# Altium PCB PCB1.PcbDoc
Units mil, origin at the board's own origin, x right, y up, seen from the top; angles counter-clockwise.
Board outline 4570.03 x 2655.03 mil, 2 copper layers (Top Layer, Bottom Layer); 58 components, 54 nets, 178 pads, 16 vias.
Unrouted connection lines stored in the file: 14.
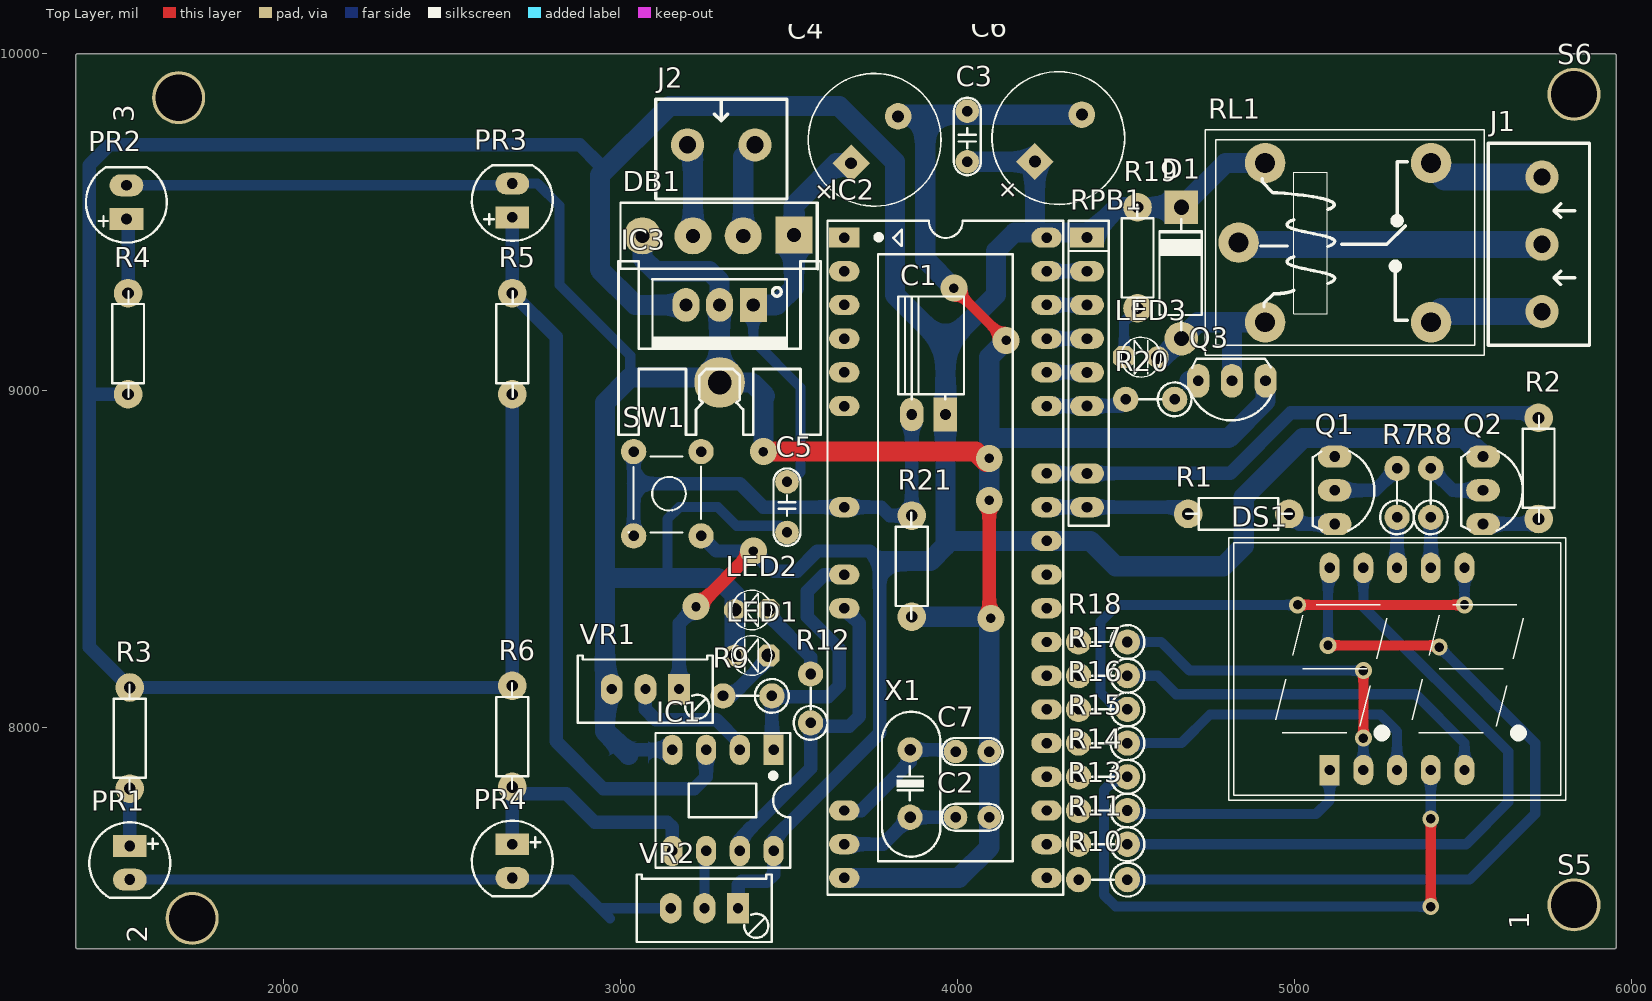
[diagram p0: Top Layer view]
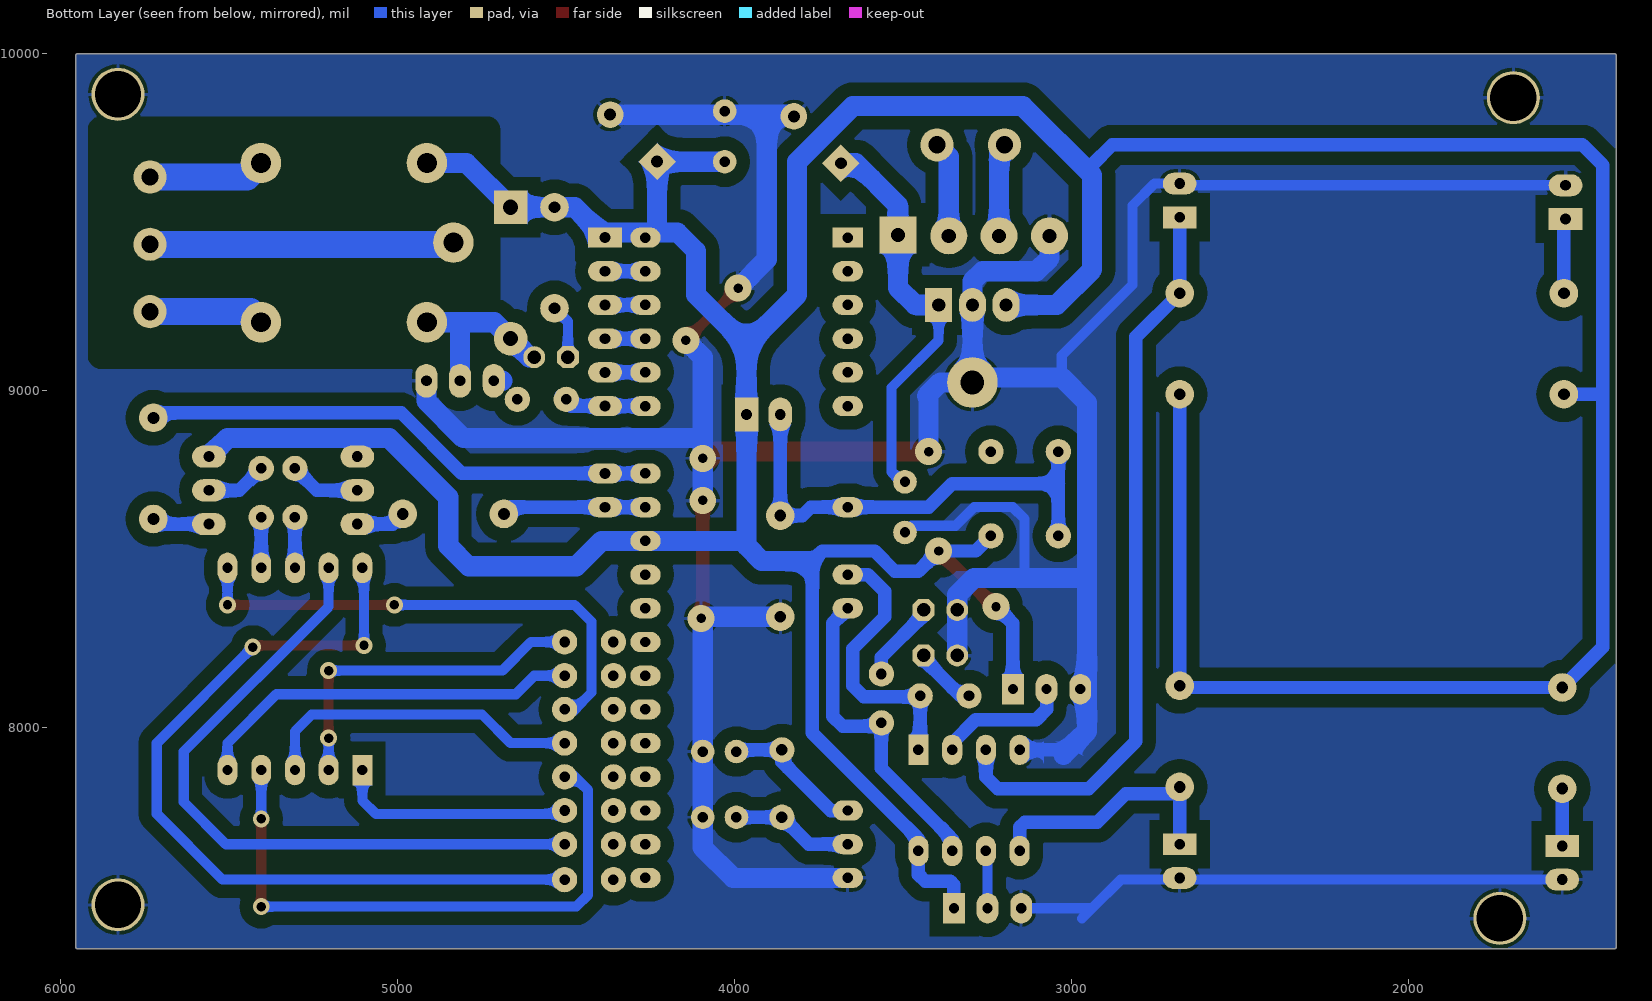
[diagram p1: Bottom Layer view, seen from below]
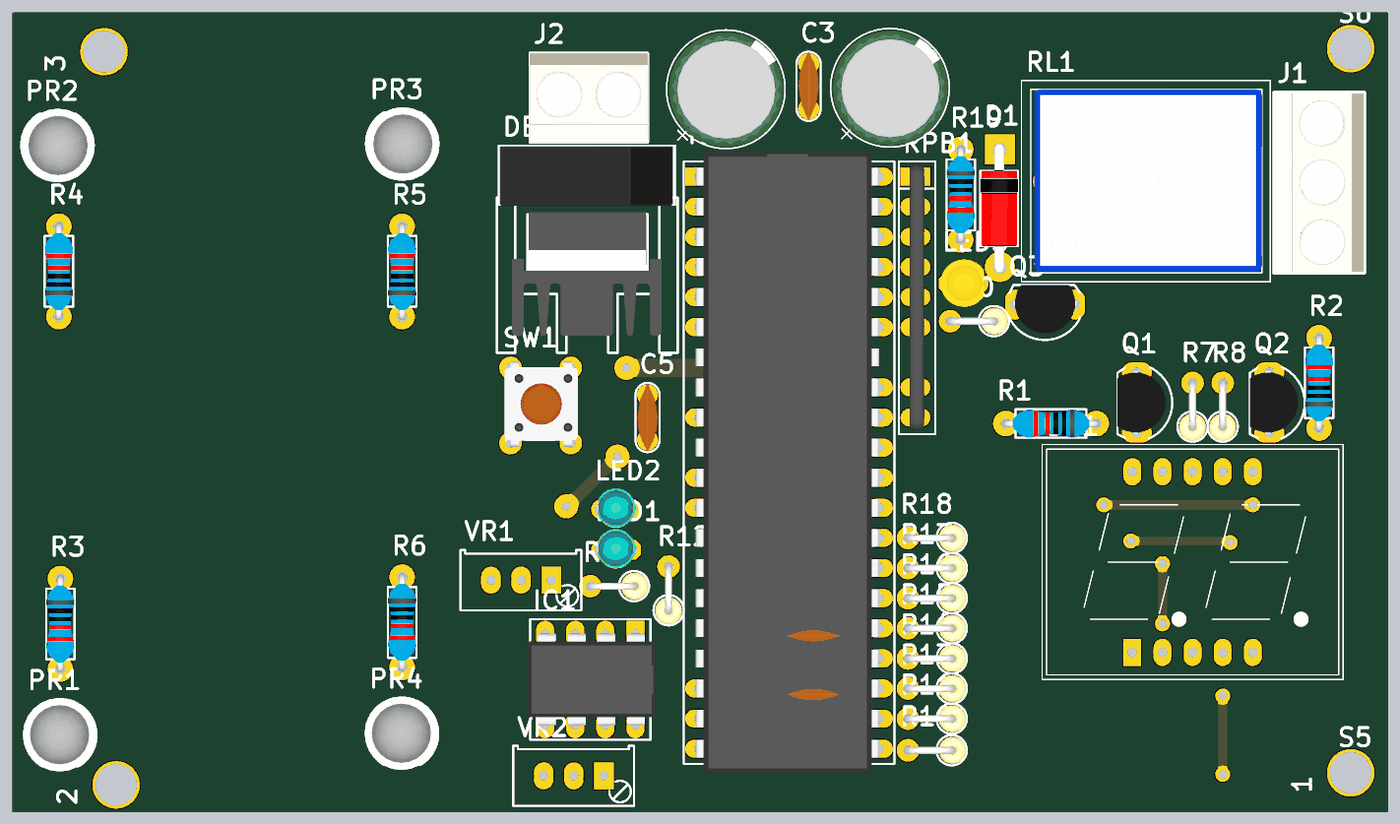
[diagram p2: 3D render of the assembled board from above, using the file's embedded part models]

## Layer stack, top to bottom
Top Solder: solder mask 0.4, Solder Resist, Dk 3.5
Top Layer: signal copper 1.4
Dielectric 1: dielectric 12.6, FR-4, Dk 4.8
Bottom Layer: signal copper 1.4
Bottom Solder: solder mask 0.4, Solder Resist, Dk 3.5

## Board outline
1384.99,7350 ccw(c1390,7350) 1390,7344.99 5950,7344.99 ccw(c5950,7350) 5955.01,7350 5955.01,9995 ccw(c5950,9995) 5950,10000.01 1390,10000.01 ccw(c1390,9995) 1384.99,9995

## Design rules (kind name [scope] priority, off if disabled: settings)
Clearance Clearance_1 [InNet('GND')] p1: gap=40
Clearance [All] p2: gap=10
PolygonConnect [All] p1: connectstyle=Relief reliefconductorwidth=10 reliefentries=4 polygonreliefangle="90 Angle" airgapwidth=10
RoomDefinition Sheet1 [InComponentClass('Sheet1')] p1: confinementstyle=ConfineIn formatcopy=TRUE lockcomponents=FALSE outline 1390,7350 5950,7350 5950,9995 1390,9995
RoutingVias [All] p1: holewidth=28 width=50 viastyle="Through Hole" minholewidth=28 minwidth=50 maxholewidth=800 maxwidth=8000
SolderMaskExpansion [All] p1: expansion=4
Width [All] p1: maxlimit=1000 minlimit=10 preferedwidth=10
30 further rules are at their usual default settings.

## Classes and differential pairs
component class Sheet1: C1 C2 C3 C4 C5 C6 C7 D1 DB1 DS1 IC1 IC2 IC3 J1 J2 LED1 LED2 LED3 PR1 PR2 PR3 PR4 Q1 Q2 Q3 R1 R2 R3 R4 R5 R6 R7 R8 R9 R10 R11 R12 R13 R14 R15 R16 R17 R18 R19 R20 R21 RPB1 S5 S6 SW1 VR1 VR2 X1

## Components (designator, comment, footprint, x,y, rotation, side; value= is the part's Value field where it differs from the comment)
1 "Comment" VDI1 5830,7475 r90 top
2 "Comment" VDI1 1730,7435 r90 top
3 "Comment" VDI1 1690,9870 r90 top
C1 "4.7uF/25V" CA-ALU-5W 3965,8930 r180 top
C2 "33pF" CN1 4045,7735 r180 top
C3 "104" CN1.5 4030,9750 r90 top
C4 "100uF/25V" CA-ALU-10GR 3755,9745 r45 top
C5 "104" CN1.5 3495,8660 r270 top
C6 "100uF/6.3V" CA-ALU-10GR 4300,9750 r45 top
C7 "33pF" CN1 4045,7930 r180 top
D1 "Diode" DIO-2A 4665,9570 r270 top
DB1 "Diode Brideg" "DIO-Bri 2A" 3516,9461 r180 top
DS1 "LED7SEG-2-0.56" LED7SEG-2-0.56 5105,7875 r0 top
IC1 "LM358" DIP8 3310,7785 r180 top
IC2 "AT89S52" DIP40/W0.6 3665,9455 r270 top
IC3 "LM78xx" TO220H1 3295,9255 r180 top
J1 "KF3" KF3-5.08 5735,9235 r90 top
J2 "KF2" KF2-5.08 3300,9730 r0 top
LED1 "LED" LED-3MM-GREEN 3440,8215 r180 top
LED2 "LED" LED-3MM-GREEN 3440,8350 r180 top
LED3 "LED" LED-3MM-YELLOW 4495,9100 r0 top
PR1 "SEND" LED-5-WHITE 1545,7600 r270 top
PR2 "SEND" LED-5-WHITE 1535,9560 r90 top
PR3 "VECIVER" LED-5-WHITE 2680,9565 r90 top
PR4 "RECIVER" LED-5-WHITE 2680,7605 r270 top
Q1 "2SA1015" TO92-123 5120,8705 r270 top
Q2 "2SA1015" TO92-123 5560,8705 r270 top
Q3 "2SC1815" TO92-123 4815,9030 r180 top
R1 "1K" RES-1/4W-SMALL 4845,8635 r180 top
R2 "1K" RES-1/4W-SMALL 5725,8760 r90 top
R3 "10K" RES-1/4W-SMALL 1545,7980 r270 top
R4 "10K" RES-1/4W-SMALL 1540,9130 r90 top
R5 "10K" RES-1/4W-SMALL 2680,9130 r90 top
R6 "10K" RES-1/4W-SMALL 2680,7985 r270 top
R7 "100" RES-1/4WD 5305,8690 r90 top
R8 "100" RES-1/4WD 5405,8690 r90 top
R9 "Res" RES-1/4WD 3385,8095 r180 top
R10 "100" RES-1/4WD 4440,7550 r180 top
R11 "100" RES-1/4WD 4440,7655 r180 top
R12 "Res" RES-1/4WD 3565,8080 r90 top
R13 "100" RES-1/4WD 4440,7755 r180 top
R14 "100" RES-1/4WD 4440,7855 r180 top
R15 "100" RES-1/4WD 4440,7955 r180 top
R16 "100" RES-1/4WD 4440,8055 r180 top
R17 "100" RES-1/4WD 4440,8155 r180 top
R18 "100" RES-1/4WD 4440,8255 r180 top
R19 "1K" RES-1/4W-SMALL 4535,9405 r270 top
R20 "1K" RES-1/4WD 4580,8975 r180 top
R21 "10K" RES-1/4W-SMALL 3865,8490 r270 top
RL1 "Relay 10A/5V" RELAY1 5170,9435 r0 top
RPB1 "10K" RN8 4385,9455 r270 top
S5 "" VDI 5830,7475 r0 top
S6 "" VDI 5830,9880 r0 top
SW1 "SW2" SW2-DIP 3240,8820 r270 top
VR1 "10K" VR-S3 3175,8115 r180 top
VR2 "10K" VR-S3 3350,7465 r180 top
X1 "12Mhz" XT2 3860,7835 r270 top
? "Comment" VDI1 5830,9880 r90 top

## Footprints (in the part's own frame and the unit in brackets; to place one, negate y for a bottom-side part, rotate by r counter-clockwise, add the part's x,y. Pads: shape width x height; smd on the part's side, far side on the other; paste and mask are expansions set on the pad)
CA-ALU-5W [mil] "Tu hoa < 22uF/16>50V"
  rect 70x100 hole 32: 1(0,0)
  oval 70x100 hole 32: 2(100,0)
  silkscreen extent -55,-350 140,-45, body extent -54,-351 144,16, height 199
CA-ALU-10GR [mm] "Polarized capacitors, Aluminum Electrolytic Capacitors, 2-Leads, Body 10x20x5x0.6"
  rect 2x2 hole 0.9: 1(-2.5,0)
  round 2 hole 0.9: 2(2.5,0)
  silkscreen extent -5,-5 5,5, body extent -4.88,-4.93 4.88,4.83, height 13.12
CN1 [mil]
  round 70 hole 31: 1(-50,0) 2(50,0)
  silkscreen extent -90,-40 91,40, body extent -115,-33 115,33, height 265
CN1.5 [mil]
  round 70 hole 31: 1(-70,0) 2(80,0)
  silkscreen extent -110,-40 120,40, body extent -110,-33 120,33, height 235
DIO-2A [mil] "Diode 2A, W 150mil, L 450mil"
  round 100 hole 45: 1(415,0)
  rect 100x100 hole 45: 2(25,0)
  silkscreen extent 61,-65 391,60, body extent 4,-65 436,61, height 113
"DIO-Bri 2A" [mil] "CAU 2A DET"
  rect 110x110 hole 42: 1(0,-2)
  round 110 hole 42: 2(151,1) 3(300,1) 4(450,1)
  silkscreen extent -70,-97 515,100, body extent -62,-95 512,102, height 650
DIP8 [mil] "DIP, 8-Leads, Row Spacing 7.62mm, Pitch 2.54mm, Body 9.91x6.73mm"
  rect 60x90 hole 31: 1(-145,-150)
  oval 60x90 hole 31: 2(-45,-150) 3(55,-150) 4(155,-150) 5(155,150) 6(55,150) 7(-45,150) 8(-145,150)
  silkscreen extent -195,-200 205,200, body extent -213,-153 213,153, height 177
DIP40/W0.6 [mil] "40 PIN, W 600mil, Pin to pin 100mil"
  rect 60x90 hole 31: 1(0,0)
  oval 60x90 hole 31: 2(100,0) 3(200,0) 4(300,0) 5(400,0) 6(500,0) 9(800,0) 11(1000,0) 12(1100,0) 18(1700,0) 19(1800,0) 20(1900,0) 21(1900,600) 22(1800,600) 23(1700,600) 24(1600,600) 25(1500,600) 26(1400,600) 27(1300,600) 28(1200,600) 29(1100,600) 30(1000,600) 31(900,600) 32(800,600) 33(700,600) 35(500,600) 36(400,600) 37(300,600) 38(200,600) 39(100,600) 40(0,600)
  silkscreen extent -50,-50 1950,650, body extent -82,-10 1982,600, height 224
KF2-5.08 [mm]
  round 2.5 hole 1.3: 1(-2.54,0) 2(2.54,0)
  silkscreen extent -4.95,-4.08 4.95,3.43, body extent -5,-4.07 5,3.43, height 10
KF3-5.08 [mm]
  round 2.5 hole 1.3: 1(0,0) 2(5.08,0) 3(10.147,0)
  silkscreen extent -2.54,-3.58 12.7,4.06, body extent -2.42,-3.51 12.58,3.99, height 10
LED7SEG-2-0.56 [mm]
  rect 1.5x2.3 hole 0.78: 1(0,0)
  oval 1.5x2.3 hole 0.78: 2(2.54,0) 3(5.08,0) 4(7.62,0) 5(10.16,0) 6(10.16,15.24) 7(7.62,15.24) 8(5.08,15.24) 9(2.54,15.24) 10(0,15.24)
  silkscreen extent -7.62,-2.29 17.78,17.53
LED-3MM-GREEN [mil]
  oct 65x65 hole 40: 1(0,0)
  round 65 hole 40: 2(100,0)
  silkscreen extent -9,-59 109,59, body extent -15,-70 112,60, height 182
LED-3MM-YELLOW [mil]
  oct 65x65 hole 40: 1(0,0)
  round 65 hole 40: 2(100,0)
  silkscreen extent -9,-59 109,59, body extent -27,-77 117,80, height 181
LED-5-WHITE [mil] "LED 2 PIN, 5 ly , Only colour, pin to pin 110mil"
  rect 65x100 hole 32: 1(-50,0)
  oval 65x100 hole 32: 2(50,0)
  silkscreen extent -120,-120 104,120, body extent -124,-125 121,120, height 340
RELAY1 [mil] "12V/10A, W400mil, L800mil,H 300mil"
  round 120 hole 59.06: 1(-335,5) 2(235.87,241.22) 3(235.87,-231.22) 4(-256.26,-231.22) 5(-256.26,241.22)
  silkscreen extent -433,-330 393,340, body extent -390,-296 365,310, height 591
RES-1/4W-SMALL [mil]
  round 85 hole 35: 1(-140,0) 2(160,0)
  silkscreen extent -148,-47 166,47, body extent -152,-47 172,47, height 97
RES-1/4WD [mil]
  round 75 hole 31.5: 1(-65,0) 2(80,0)
  silkscreen extent -115,-50 40,50, body extent -112,-45 92,46, height 379
RN8 [mil] "R SIP8, 9 Pin"
  rect 60x100 hole 32: 1(0,0)
  oval 60x100 hole 32: 2(100,0) 3(200,0) 4(300,0) 5(400,0) 6(500,0) 8(700,0) 9(800,0)
  silkscreen extent -50,-55 855,65, body extent -43,-20 843,29, height 219
SW2-DIP [mil] "SW button 4pin, 250 x250 mil"
  round 75 hole 31: 1(0,0) 2(0,-200) 3(250,-200) 4(250,0)
  silkscreen extent 15,-215 240,0, body extent -36,-220 276,24, height 276
TO92-123 [mil] "TO-92"
  oval 66x100 hole 32: 1(-100,0) 2(0,0) 3(100,0)
  silkscreen extent -117,-65 120,118, body extent -109,-66 109,95, height 245
TO220H1 [mil] "TO-220 - 1-2-3"
  rect 80x100 hole 39: 1(-100,0)
  round 150 hole 70: 2(0,230)
  oval 80x100 hole 39: 2(0,0) 3(100,0)
  silkscreen extent -300,-130 300,385, body extent -246,-82 250,329, height 1000
VDI [mm] "SMD Steel Spacer with internal Thread"
  round 2 hole 3 unplated: 1(0,0)
  round 0 smd paste-2539.97: 1(0,0)
  round 0 smd far side paste-2539.97: 1(0,0)
VDI1 [mm] "SMD Steel Spacer with internal Thread"
  round 4 hole 3.5: 1(0,0)
VR-S3 [mil] "Variable Resistor"
  rect 65x90 hole 30: 1(0,0)
  oval 65x90 hole 30: 2(100,0) 3(200,0)
  silkscreen extent -100,-100 301,100, body extent -91,-98 291,90, height 430
XT2 [mil] "Footpin for Crystal 2 pin"
  round 75 hole 34: 1(-100,0) 2(100,0)
  silkscreen extent -213,-83 217,90, body extent -216,-87 216,90, height 144

## Part data
C1 C4 C6: library part CN-ALU-DIP, "Capacitor (Semiconductor SIM Model)"
C2 C3 C5 C7: library part CN
D1: "Default Diode"
DB1: library part "DIODE BRI TYPE A", "Convert AC to DC voltage, 4 pin"
IC1: "Low-Power Dual Operational Amplifier"
IC2: "AT89S52, 8k Byte Flash Memory , 40 Pin"
IC3: "Positive Voltage Regulator"
LED1 LED2 LED3: "LED Single colour Green and Red"
PR1 PR2 PR3 PR4: library part CDS1, "Photoresistor"
Q1 Q2: "PNP 600mW, ECB"
Q3: "NPN 600mW, ECB"
R1 R2 R3 R4 R5 R6 R7 R8 R10 R11 R13 R14 R15 R16 R17 R18 R19 R20 R21: library part Res, "Res"
RL1: library part Relay1, "Relay SPDT,10A - 12VDC 5 Pin"
RPB1: library part RN8, "Resistor 8 (Thanh)"
S5 S6: library part VDI, "WA-SMSE SMD Steel Spacer with external Thread"
SW1: "Switch button 4 pin"
VR1 VR2: library part VR-S, "Var Resistor"
X1: library part XT2, "Crystal, 32.768 KHz, -40 to 85 degC, 3.2 x 1.5 x 0.9 mm SMD"

## Via types
v1: diameter 80, hole 28, Top Layer to Bottom Layer, 8 vias
v2: diameter 50, hole 28, Top Layer to Bottom Layer, 8 vias

## Nets (pads, with @x,y where several pads share a name; then routed paths per layer and width w, separated by ;. In a path a pad name is that pad's centre, name@x,y a point inside that pad or via, vN(x,y) a via of type N, cw(c..) or ccw(c..) an arc to the next point about the centre after c; other vN are vias at no path point)
0: IC2.39 RPB1.2 | length 120
  Bottom Layer w40: IC2.39 RPB1.2
1: IC2.38 RPB1.3 | length 120
  Bottom Layer w40: IC2.38 RPB1.3
2: IC2.37 RPB1.4 | length 120
  Bottom Layer w40: IC2.37 RPB1.4
3: IC2.36 RPB1.5 | length 120
  Bottom Layer w40: IC2.36 RPB1.5
4: IC2.35 R20.2 RPB1.6 | length 262.4
  Bottom Layer w40: IC2.35 RPB1.6 4485,8955 R20.2@4515,8985
5: 
6: IC2.33 R2.2 RPB1.8 | length 1540.8
  Bottom Layer w40: IC2.33 RPB1.8 4810,8755 4990,8935 5710,8935 R2.2
7: IC2.32 R1.2 RPB1.9 | length 428.3
  Bottom Layer w40: IC2.32 RPB1.9 4665,8655 R1.2
DT1: IC1.3 PR3.1 R5.2 | length 2206.3
  Bottom Layer w40: PR3.1 R5.2 2810,9160 2810,7960 2950,7820 3220,7820 3255,7855 IC1.3
DT2: IC1.5 PR4.1 R6.2 | length 764.7
  Bottom Layer w40: PR4.1 R6.2 2700,7805 2840,7805 2925,7720 3140,7720 3155,7705 IC1.5
GND: 1.1 2.1 3.1 ?.1 C2.1 C3.2 C4.2 C5.2 C6.2 C7.1 DB1.4 IC1.4 IC2.20 IC3.2 LED1.2 LED2.2 PR1.2 PR2.2 PR3.2 PR4.2 Q3.1 R21.2 S5.1 S6.1 VR1.3 VR2.3 | length 12446.2
  Top Layer w30: v1(3990,9305) v1(4145,9150)
  Top Layer w40: v1(4095,8675) 4095,8330 v1(4100,8325)
  Top Layer w60: v1(3425,8820) 4055,8820 4085,8790 v1(4095,8800)
  Bottom Layer w30: PR2.2 2675,9610 PR3.2 2755,9615 2820,9550 2820,9315 3030,9105 3030,9040 ; PR1.2 2855,7550 2940,7465 ; 2970,7435 2940,7465 ; 3140,8445 3140,8620 3175,8655 3290,8655 3345,8600 3475,8600 C5.2 ; VR2.3 2940,7465
  Bottom Layer w40: 3025,7920 3040,7935 IC1.4
  Bottom Layer w60: 3025,7920 2955,7990 2955,8445 ; DB1.4 3066,9394 3105,9355 3265,9355 3295,9325 3295,9255 IC3.2@3295,9025 ; LED1.2 LED2.2 3340,8395 3290,8445 3140,8445 2955,8445 ; v1(3425,8820) 3425,8980 3430,8985 3390,9025 IC3.2@3295,9025 ; IC2.20 4005,7555 4095,7645 C2.1 C7.1 v1@4095,8320 ; C4.2 3829.6,9819.6 3905,9819.6 ; R21.2 4085,8330 v1@4095,8320 ; v1(3990,9305) 3905,9390 3905,9819.6 ; v1(4095,8675) v1(4095,8800) 4095,8855 ; v1(4100,8325) v1@4095,8320 ; v1(4145,9150) 4095,9100 4095,8855 ; C6.2 3905,9819.6 ; Q3.1 4915,8970 4805,8860 4100,8860 4095,8855 ; 2955,8445 2955,8965 3030,9040 3280,9040 IC3.2@3295,9025
IN1: IC1.1 IC2.11 R9.1 | length 825.6
  Bottom Layer w40: R9.1 R9.1@3450,8092.5 ; IC1.1 3450,7940 R9.1@3450,8092.5 ; IC2.11 3605,8455 3555,8405 3555,8330 3650,8235 3650,8125 3617.5,8092.5 R9.1@3450,8092.5
IN2: IC1.7 IC2.12 R12.1 | length 991.3
  Bottom Layer w40: IC1.7 3355,7670 3565,7880 3565,8005 R12.1@3575,8015 ; R12.1 R12.1@3575,8015 ; IC2.12@3645,8355 IC2.12 3710,8310 3710,8035 3680,8005 3585,8005 R12.1@3575,8015
NetC4_1: C4.1 C5.1 DB1.1 IC3.1 | length 1223.5
  Bottom Layer w30: IC3.1 3395,9150 3535,9010 3535,8760 3505,8730 C5.1 C5.1@3485,8730
  Bottom Layer w60: IC3.1 3465,9255 3516,9306 DB1.1 3516,9551 3640.4,9675.4 C4.1
NetD1_1: D1.1 LED3.2 Q3.2 RL1.4 | length 535.5
  Bottom Layer w60: LED3.2 4610,9100 D1.1 4713.78,9203.78 4815,9203.78 ; Q3.2 4815,9203.78 ; RL1.4 4815,9203.78
NetDB1_2: DB1.2 J2.2 | length 284.5
  Bottom Layer w60: DB1.2 3365,9695 J2.2
NetDB1_3: DB1.3 J2.1 | length 276.6
  Bottom Layer w60: J2.1 3216,9714 DB1.3
NetIC1_2: IC1.2 VR1.2 | length 401.4
  Bottom Layer w40: VR1.2 3075,8055 3105,8025 3285,8025 3355,7955 IC1.2
NetIC1_6: IC1.6 VR2.2 | length 172.1
  Bottom Layer w30: VR2.2 3250,7630 IC1.6
NetIC2_21: IC2.21 R10.2
NetIC2_22: IC2.22 R11.2
NetIC2_23: IC2.23 R13.2
NetIC2_24: IC2.24 R14.2
NetIC2_25: IC2.25 R15.2
NetIC2_26: IC2.26 R16.2
NetIC2_27: IC2.27 R17.2
NetIC2_28: IC2.28 R18.2
NetJ1_1: J1.1 RL1.3 | length 342.1
  Bottom Layer w80: RL1.3 5437.09,9235 J1.1
NetJ1_2: J1.2 RL1.1 | length 902.1
  Bottom Layer w80: RL1.1 4840,9435 J1.2
NetJ1_3: J1.3 RL1.2 | length 346.4
  Bottom Layer w80: RL1.2 5447.59,9634.5 J1.3
NetLED1_1: LED1.1 R9.2 | length 190.6
  Bottom Layer w40: R9.2 3330,8095 3440,8205 LED1.1
NetLED2_1: LED2.1 R12.2 | length 241.8
  Bottom Layer w40: LED2.1 3440,8335 3565,8210 R12.2
NetLED3_1: LED3.1 R19.2 | length 161.6
  Bottom Layer w30: LED3.1 4495,9205 R19.2
NetPR1_1: PR1.1 R3.2 | length 170
  Bottom Layer w40: PR1.1 R3.2
NetPR2_1: PR2.1 R4.2 | length 222.1
  Bottom Layer w40: PR2.1 1540,9505 R4.2
NetQ1_2: Q1.2 R7.2 | length 211.9
  Bottom Layer w40: Q1.2 5240,8705 R7.2
NetQ1_3: Q1.3 R1.1 | length 147.4
  Bottom Layer w40: R1.1 5015,8605 Q1.3
NetQ2_2: Q2.2 R8.2 | length 181.9
  Bottom Layer w40: R8.2 5470,8705 Q2.2
NetQ2_3: Q2.3 R2.1 | length 171.2
  Bottom Layer w40: Q2.3 5710,8605 R2.1
NetQ3_3: Q3.3 R20.1 | length 25
  Bottom Layer w60: Q3.3@4690,9030 Q3.3
RST: C1.2 IC2.9 R21.1 SW1.2 SW1.3 | length 1389.4
  Bottom Layer w40: SW1.3 3040,8725 ; SW1.2@3040,8795 3040,8725 ; C1.2 R21.1 3800,8630 3775,8655 IC2.9 3425,8655 3355,8725 3040,8725
SEG1: DS1.8 R7.1 | length 150
  Bottom Layer w40: DS1.8 R7.1
SEG2: DS1.7 R8.1 | length 150
  Bottom Layer w40: DS1.7 R8.1
SEGA: DS1.10 R10.1 | length 2468
  Top Layer w30: v2(5100,8245) 5425,8245 v2(5430,8240)
  Bottom Layer w30: R10.1 5520,7550 5715,7745 5715,7955 v2(5430,8240) ; v2(5100,8245) 5100,8470 DS1.10
SEGB: DS1.9 R11.1 | length 2054.9
  Bottom Layer w30: R11.1 5510,7655 5635,7780 5635,7930 5205,8360 DS1.9
SEGC: DS1.1 R13.1 | length 710.7
  Bottom Layer w30: R13.1 4515,7745 5065,7745 5105,7785 DS1.1
SEGD: DS1.4 R14.1 | length 1786.1
  Top Layer w30: v2(5405,7470) v2(5405,7730)
  Bottom Layer w30: R14.1 4475,7855 4435,7815 4435,7505 4470,7470 v2(5405,7470) ; v2(5405,7730) DS1.4
SEGE: DS1.3 R15.1 | length 970.9
  Bottom Layer w30: R15.1 4665,7955 4750,8040 5255,8040 5305,7990 DS1.3
SEGF: DS1.6 R16.1 | length 1521.4
  Top Layer w30: v2(5010,8365) v2(5505,8365)
  Bottom Layer w30: R16.1 4475,8055 4425,8105 4425,8315 4475,8365 v2(5010,8365) ; v2(5505,8365) DS1.6
SEGG: DS1.5 R17.1 | length 1162.8
  Bottom Layer w30: R17.1 4595,8155 4650,8100 5360,8100 5505,7955 DS1.5
SEGH: DS1.2 R18.1 | length 1030.2
  Top Layer w30: v2(5205,7970) v2(5205,8170)
  Bottom Layer w30: R18.1 4605,8255 4690,8170 v2(5205,8170) ; DS1.2 v2(5205,7970)
VCC: C1.1 C3.1 C6.1 D1.2 IC1.8 IC2.31 IC2.40 IC3.3 Q1.1 Q2.1 R3.1 R4.1 R5.1 R6.1 R19.1 RL1.5 RPB1.1 SW1.1 SW1.4 VR1.1 VR2.1 | length 14337.3
  Top Layer w40: v1(3225,8360) 3230,8360 v1(3395,8525)
  Bottom Layer w40: R4.1 1425,8990 ; R5.1 R6.1 2675,8120 R3.1 1425,8240 1425,8990 ; 2940,9640 2940,9670 2880,9730 1485,9730 1425,9670 1425,8990 ; VR1.1 3175,8310 v1(3225,8360) ; SW1.4 3285,8525 v1(3395,8525) 3455,8465 3525,8465 3585,8525 3740,8525 3770,8495 3770,7985 3455,7670 IC1.8 3455,7565 3435,7545 3360,7545 3350,7535 VR2.1 VR2.1@3350,7445
  Bottom Layer w60: IC3.3 3045,9255 2940,9360 2940,9640 3145,9845 3650,9845 3815,9680 3815,9285 3965,9135 ; 3770,8495 3920,8495 3965,8540 ; C3.1 4230,9680 C6.1 4230.4,9489.6 IC2.40@4250,9470 ; RL1.5 4796.22,9676.22 D1.2 R19.1 4475,9545 4400,9470 IC2.40@4250,9470 ; Q1.1 5120,8860 ; Q2.1 5505,8860 5120,8860 ; 3965,8540 3980,8555 IC2.31 4395,8555 4470,8480 4790,8480 4850,8540 4850,8685 5025,8860 5120,8860 ; 3965,8540 C1.1 3965,9135 ; 3965,9135 4115,9285 4115,9415 4170,9470 IC2.40@4250,9470
XT1: C2.2 IC2.19 X1.2 | length 363.1
  Bottom Layer w40: IC2.19 3780,7655 X1.2 C2.2
XT2: C7.2 IC2.18 X1.1 | length 427.1
  Bottom Layer w40: IC2.18 3715,7755 3860,7900 X1.1 3990,7935 C7.2
pads on no net: IC2.1 IC2.2 IC2.3 IC2.4 IC2.5 IC2.6 IC2.29 IC2.30

## Polygon pours and split planes (outlines as drawn)
GND on Bottom Layer "GND_L02_P012" (solid, pour order 12): 1385,7345 1385,10000 5955,10000 5955,7345

## Text inside footprints (layer, text, board x,y; h text height)
C4: Top Overlay "+" at 3599.44,9548.4 h59.06 r45
C6: Top Overlay "+" at 4144.44,9553.4 h59.06 r45